# Altium PCB STM 32 F4 Robusta V1.PcbDoc (part 5 of 7)
Units mm, origin at the board's own origin, x right, y up, seen from the top; angles counter-clockwise.
Board outline 287.78 x 230 mm, 2 copper layers (Top Layer, Bottom Layer); 54 components, 96 nets, 355 pads, 16 vias.
Unrouted connection lines stored in the file: 3.
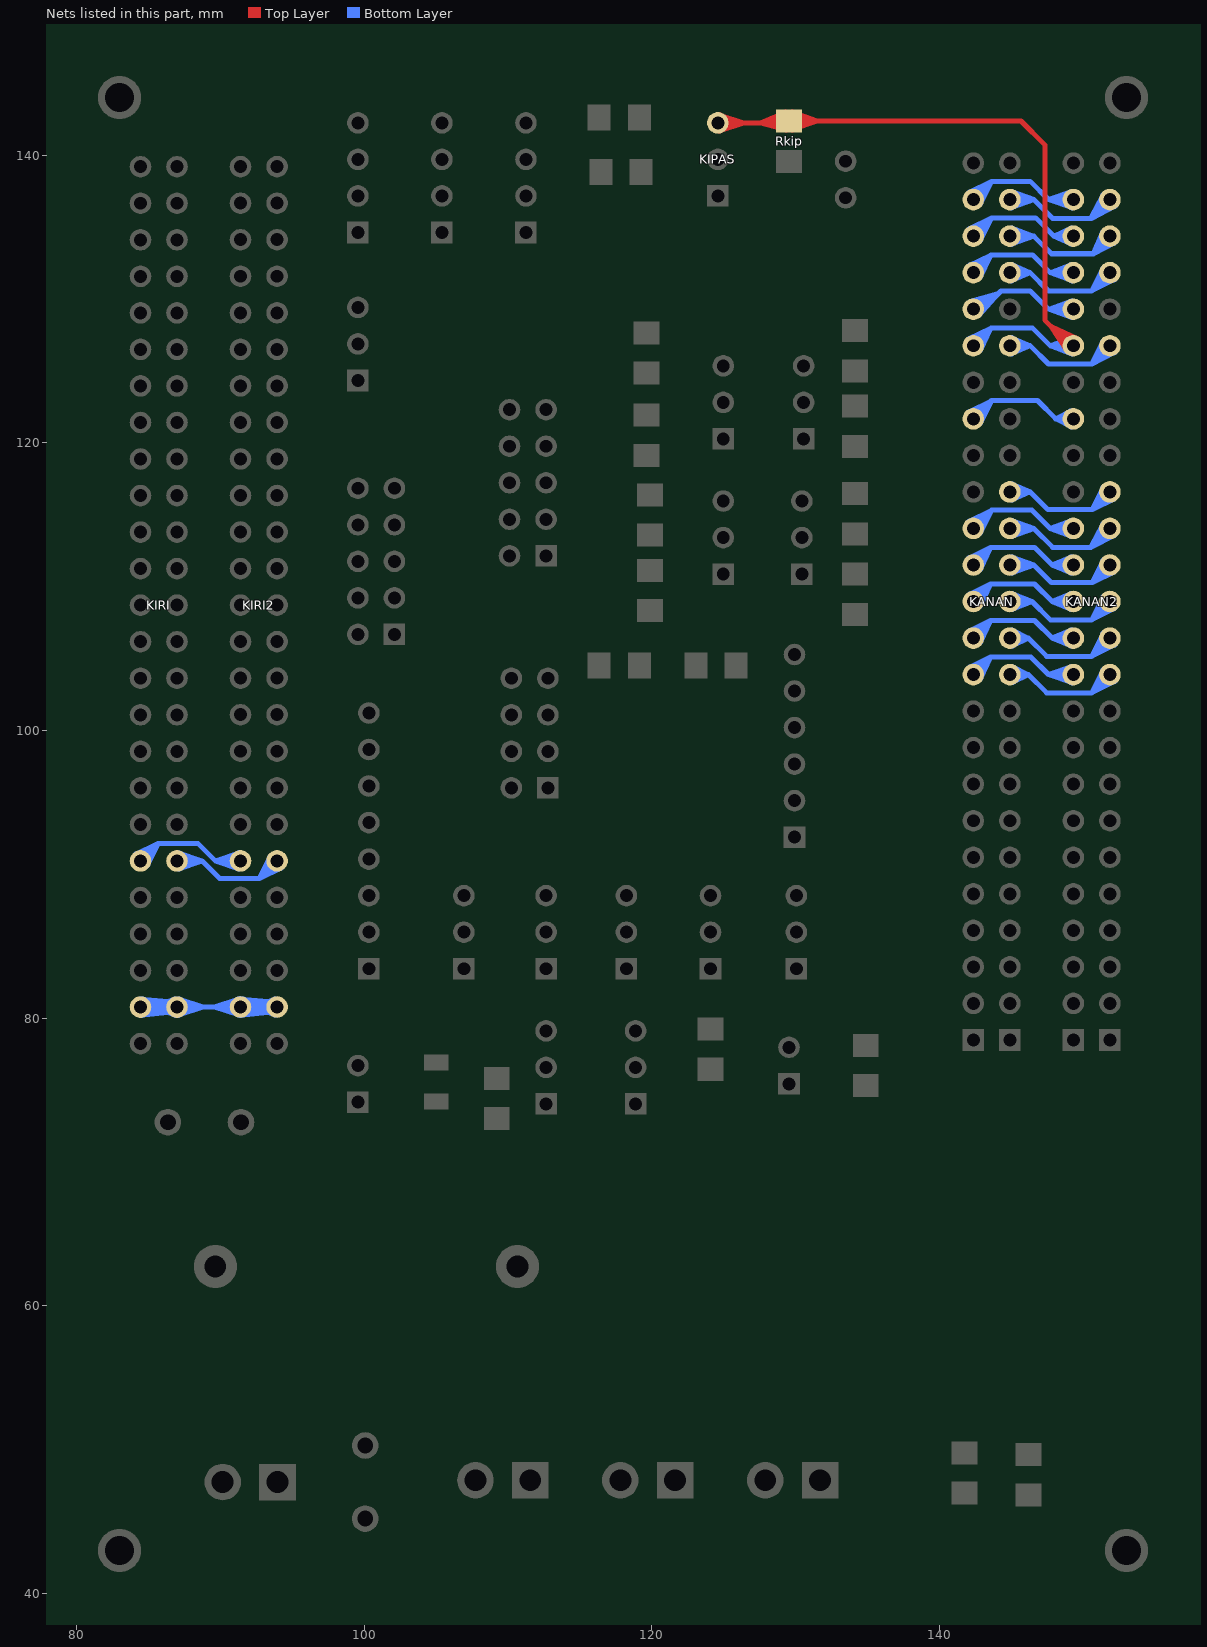
[diagram p5: the nets of this part, all layers, seen from the top]

## Via types
v1: diameter 1, hole 0.5, Top Layer to Bottom Layer, 13 vias
v2: diameter 0.8, hole 0.5, Top Layer to Bottom Layer, 3 vias

## Nets (pads, with @x,y where several pads share a name; then routed paths per layer and width w, separated by ;. In a path a pad name is that pad's centre, name@x,y a point inside that pad or via, vN(x,y) a via of type N, cw(c..) or ccw(c..) an arc to the next point about the centre after c; other vN are vias at no path point) (continued)
NetKANAN2_21: KANAN2.21 KANAN.21 KIRI2.3 KIRI2.4 KIRI.3 KIRI.4 | length 263.7
  Bottom Layer w0.35: KIRI.4@84.423,80.549 KIRI.3@86.357,80.386 ; KIRI.4@84.423,80.995 KIRI.3@86.357,81.158 ; KIRI.4@84.425,80.198 KIRI.3@86.357,80.386 ; KIRI.4@84.425,81.346 KIRI.3@86.357,81.158 ; KIRI.4@84.452,80.547 KIRI.3@86.304,80.633 ; KIRI.4@84.452,80.997 KIRI.3@86.304,80.911 ; KIRI.4@84.486,80.549 KIRI.3@86.304,80.911 ; KIRI.4@84.486,80.995 KIRI.3@86.304,80.633 ; KIRI.4@84.49,80.55 85.484,80.819 ; KIRI.4@84.49,80.994 85.484,80.725 ; KIRI.4@84.501,80.199 KIRI.3@86.304,80.633 ; KIRI.4@84.501,81.345 KIRI.3@86.304,80.911 ; KIRI.4@84.512,80.554 KIRI.3@86.357,81.158 ; KIRI.4@84.512,80.99 KIRI.3@86.357,80.386 ; KIRI.4@84.547,80.204 KIRI.3@86.255,80.772 ; KIRI.4@84.547,81.34 KIRI.3@86.255,80.772 ; KIRI.4@84.587,80.212 KIRI.3@86.304,80.911 ; KIRI.4@84.587,81.332 KIRI.3@86.304,80.633 ; KIRI.4@84.59,80.213 85.484,80.725 ; KIRI.4@84.59,81.331 85.484,80.819 ; KIRI.4@84.641,80.228 85.484,80.819 ; KIRI.4@84.641,81.316 85.484,80.725 ; KIRI.4@84.652,80.232 KIRI.3@86.357,81.158 ; KIRI.4@84.652,81.312 KIRI.3@86.357,80.386 ; KIRI.4@84.862,80.365 cw(c85.843,79.384) 85.843,80.772 cw(c85.843,82.16) KIRI.4@84.862,81.179 ; KIRI.3@86.588,80.365 ccw(c85.607,79.384) 85.607,80.772 ccw(c85.607,82.16) KIRI.3@86.588,81.179 ; KIRI.3@86.809,80.228 85.966,80.819 ; KIRI.3@86.809,81.316 85.966,80.725 ; KIRI.3@86.86,80.213 85.966,80.725 ; KIRI.3@86.86,81.331 85.966,80.819 ; KIRI.3@86.903,80.204 KIRI.4@85.195,80.772 ; KIRI.3@86.903,81.34 KIRI.4@85.195,80.772 ; KIRI.3@86.96,80.55 85.966,80.819 ; KIRI.3@86.96,80.994 85.966,80.725 ; KIRI.3@87.03,80.55 88.024,80.819 ; KIRI.3@87.03,80.994 88.024,80.725 ; KIRI.3@87.087,80.204 88.795,80.772 ; KIRI.3@87.087,81.34 88.795,80.772 ; KIRI.3@87.13,80.213 88.024,80.725 ; KIRI.3@87.13,81.331 88.024,80.819 ; KIRI.3@87.181,80.228 88.024,80.819 ; KIRI.3@87.181,81.316 88.024,80.725 ; KIRI.3@87.402,80.365 cw(c88.383,79.384) 88.383,80.772 cw(c88.383,82.16) KIRI.3@87.402,81.179 ; 90.01,80.772 ccw(c90.01,82.177) KIRI2.4@91.003,81.184 ; 90.034,80.772 cw(c90.034,79.401) KIRI2.4@91.003,80.37 ; KIRI2.4@91.221,81.32 90.389,80.725 ; KIRI2.4@91.228,80.232 90.373,80.82 ; KIRI2.4@91.274,81.336 90.373,80.82 ; KIRI2.4@91.276,80.218 90.389,80.725 ; KIRI2.4@91.317,81.344 89.61,80.772 ; KIRI2.4@91.32,80.209 89.61,80.772 ; KIRI2.4@91.374,80.999 90.389,80.725 ; KIRI2.4@91.376,80.555 90.373,80.82 ; KIRI2.4@91.378,80.554 KIRI2.3@93.308,80.391 ; KIRI2.4@91.378,81 KIRI2.3@93.315,81.163 ; KIRI2.4@91.38,80.203 KIRI2.3@93.308,80.391 ; KIRI2.4@91.38,81.351 KIRI2.3@93.315,81.163 ; KIRI2.4@91.395,81.001 90.373,80.82 ; KIRI2.4@91.395,81.002 89.61,80.772 ; KIRI2.4@91.407,80.552 KIRI2.3@93.254,80.636 ; KIRI2.4@91.407,81.002 KIRI2.3@93.263,80.915 ; KIRI2.4@91.44,80.554 KIRI2.3@93.263,80.915 ; KIRI2.4@91.441,81 KIRI2.3@93.254,80.636 ; KIRI2.4@91.444,80.555 92.446,80.82 ; KIRI2.4@91.446,80.999 92.431,80.725 ; KIRI2.4@91.456,80.204 KIRI2.3@93.254,80.636 ; KIRI2.4@91.456,81.35 KIRI2.3@93.263,80.915 ; KIRI2.4@91.467,80.559 KIRI2.3@93.315,81.163 ; KIRI2.4@91.468,80.994 KIRI2.3@93.308,80.391 ; KIRI2.4@91.5,80.209 KIRI2.3@93.21,80.772 ; KIRI2.4@91.501,80.209 KIRI2.3@93.211,80.775 ; KIRI2.4@91.502,81.345 KIRI2.3@93.211,80.775 ; KIRI2.4@91.503,81.344 KIRI2.3@93.21,80.772 ; KIRI2.4@91.541,80.217 KIRI2.3@93.263,80.915 ; KIRI2.4@91.542,81.337 KIRI2.3@93.254,80.636 ; KIRI2.4@91.544,80.218 92.431,80.725 ; KIRI2.4@91.546,81.336 92.446,80.82 ; KIRI2.4@91.592,80.232 92.446,80.82 ; KIRI2.4@91.599,81.32 92.431,80.725 ; KIRI2.4@91.606,80.236 KIRI2.3@93.315,81.163 ; KIRI2.4@91.607,81.317 KIRI2.3@93.308,80.391 ; KIRI2.4@91.817,80.37 cw(c92.786,79.401) 92.786,80.772 ; KIRI2.4@91.817,81.184 ccw(c92.81,82.177) 92.81,80.772 ; 92.55,80.772 ccw(c92.55,82.177) KIRI2.3@93.543,81.184 ; 92.574,80.772 cw(c92.574,79.401) KIRI2.3@93.543,80.37 ; KIRI2.3@93.761,81.32 92.929,80.725 ; KIRI2.3@93.768,80.232 92.913,80.82 ; KIRI2.3@93.814,81.336 92.913,80.82 ; KIRI2.3@93.816,80.218 92.929,80.725 ; KIRI2.3@93.857,81.344 KIRI2.4@92.15,80.772 ; KIRI2.3@93.86,80.209 KIRI2.4@92.15,80.772 ; KIRI2.3@93.914,80.999 92.929,80.725 ; KIRI2.3@93.916,80.555 92.913,80.82 ; KIRI2.3@93.935,81.001 92.913,80.82 ; KIRI2.3@93.935,81.002 KIRI2.4@92.15,80.772 ; KIRI2.3@93.945,80.772 KIRI.3@86.995,80.772 ; KANAN.21@144.903,103.661 145.818,103.829 ; KANAN.21@144.903,104.111 145.818,103.943 ; KANAN.21@144.91,103.662 146.177,103.886 ; KANAN.21@144.91,104.11 146.177,103.886 ; KANAN.21@144.931,103.665 145.818,103.943 ; KANAN.21@144.931,104.107 145.818,103.829 ; KANAN.21@145.018,103.326 146.177,103.886 ; KANAN.21@145.018,104.446 146.177,103.886 ; KANAN.21@145.034,103.329 145.818,103.829 ; KANAN.21@145.034,104.443 145.818,103.943 ; KANAN.21@145.101,103.351 145.818,103.943 ; KANAN.21@145.101,104.421 145.818,103.829 ; KANAN.21@145.318,103.502 cw(c146.177,102.733) 146.177,103.886 ; KANAN.21@145.318,104.27 ccw(c146.177,105.039) 146.177,103.886 ; KANAN2.21@151.27,103.886 cw(c149.882,103.886) 150.863,102.904 cw(c151.845,101.923) KANAN2.21@151.845,103.311 ; KANAN2.21@151.329,104.139 151.151,103.125 ; KANAN2.21@151.354,104.186 151.084,103.192 ; KANAN2.21@151.379,104.222 150.575,102.616 ; KANAN2.21@151.663,104.019 151.151,103.125 ; KANAN2.21@151.978,103.704 151.084,103.192 ; KANAN2.21@152.099,103.37 151.084,103.192 ; KANAN2.21@152.145,103.395 151.151,103.125 ; KANAN2.21@152.181,103.42 150.575,102.616 ; KIRI.4@84.455,80.772 KIRI.3@86.357,81.158 ; KIRI.4@84.455,80.772 85.484,80.819 ; KIRI.4@84.455,80.772 KIRI.3@86.304,80.911 ; KIRI.4@84.455,80.772 KIRI.3@86.304,80.633 ; KIRI.4@84.455,80.772 KIRI.3@86.357,80.386 ; KIRI.4@84.455,80.772 85.484,80.725 ; KIRI.4@84.455,80.772 KIRI.3@86.995,80.772 ; KIRI.4@85.195,80.772 86.981,80.997 85.966,80.819 ; KIRI.4@85.195,80.772 86.981,80.547 85.966,80.725 ; 85.484,80.725 84.469,80.547 KIRI.3@86.255,80.772 ; 85.484,80.819 84.469,80.997 KIRI.3@86.255,80.772 ; 85.966,80.725 KIRI.3@86.995,80.772 ; 85.966,80.819 KIRI.3@86.995,80.772 ; KIRI.3@86.995,80.772 88.024,80.819 ; KIRI.3@86.995,80.772 88.024,80.725 ; 88.024,80.725 87.009,80.547 88.795,80.772 ; 88.024,80.819 87.009,80.997 88.795,80.772 ; 89.61,80.772 KIRI2.4@91.41,80.777 ; 89.61,80.772 91.397,80.552 90.389,80.725 ; 90.373,80.82 KIRI2.4@91.41,80.777 ; 90.389,80.725 KIRI2.4@91.41,80.777 ; KIRI2.4@91.41,80.777 KIRI2.3@93.21,80.772 ; KIRI2.4@91.41,80.777 KIRI2.3@93.315,81.163 ; KIRI2.4@91.41,80.777 KIRI2.3@93.211,80.775 ; KIRI2.4@91.41,80.777 KIRI2.3@93.263,80.915 ; KIRI2.4@91.41,80.777 KIRI2.3@93.254,80.636 ; KIRI2.4@91.41,80.777 KIRI2.3@93.308,80.391 ; KIRI2.4@91.41,80.777 92.446,80.82 ; KIRI2.4@91.41,80.777 92.431,80.725 ; KIRI2.4@91.423,80.552 KIRI2.3@93.21,80.772 ; KIRI2.4@91.424,80.552 KIRI2.3@93.211,80.775 ; KIRI2.4@91.423,80.552 92.431,80.725 ; KIRI2.4@91.425,81.002 KIRI2.3@93.21,80.772 ; KIRI2.4@91.424,81.002 KIRI2.3@93.211,80.775 ; KIRI2.4@91.425,81.001 92.446,80.82 ; KIRI2.4@92.15,80.772 KIRI2.3@93.95,80.777 ; KIRI2.4@92.15,80.772 93.937,80.552 92.929,80.725 ; 92.913,80.82 KIRI2.3@93.95,80.777 ; 92.929,80.725 KIRI2.3@93.95,80.777 ; KANAN.21@144.89,103.886 145.818,103.829 ; KANAN.21@144.89,103.886 145.818,103.943 ; KANAN.21@144.89,103.886 146.177,103.886 ; 146.177,103.886 147.447,102.616 150.575,102.616 ; 150.575,102.616 KANAN2.21@151.845,103.886 ; 150.575,102.616 151.676,104.035 151.084,103.192 ; 150.575,102.616 151.994,103.717 151.151,103.125 ; 150.575,102.616 KANAN2.21@151.845,103.886 ; 151.084,103.192 KANAN2.21@151.845,103.886 ; 151.151,103.125 KANAN2.21@151.845,103.886
NetKANAN2_22: KANAN2.22 KANAN.22 | length 48.5
  Bottom Layer w0.35: KANAN.22@142.017,104.354 143.575,105.111 ; KANAN.22@142.05,104.377 143.044,104.647 ; KANAN.22@142.096,104.402 143.111,104.58 ; KANAN.22@142.217,104.068 143.111,104.58 ; KANAN.22@142.35,104.461 ccw(c142.35,105.849) 143.332,104.868 ccw(c144.313,103.886) KANAN.22@142.925,103.886 ; KANAN.22@142.532,103.753 143.044,104.647 ; KANAN.22@142.818,103.553 143.575,105.111 ; KANAN.22@142.841,103.586 143.111,104.58 ; KANAN.22@142.866,103.633 143.044,104.647 ; KANAN2.22@148.898,103.479 ccw(c147.917,102.498) 147.917,103.886 ccw(c147.917,105.274) KANAN2.22@148.898,104.293 ; KANAN2.22@149.119,103.342 148.276,103.933 ; KANAN2.22@149.119,104.43 148.276,103.839 ; KANAN2.22@149.17,103.327 148.276,103.839 ; KANAN2.22@149.17,104.445 148.276,103.933 ; KANAN2.22@149.21,103.319 147.574,103.886 ; KANAN2.22@149.21,104.453 147.574,103.886 ; KANAN2.22@149.27,103.664 148.276,103.933 ; KANAN2.22@149.27,104.108 148.276,103.839 ; KANAN2.22@149.29,103.661 147.574,103.886 ; KANAN2.22@149.29,104.111 147.574,103.886 ; KANAN2.22@149.291,103.661 148.276,103.839 ; KANAN2.22@149.291,104.111 148.276,103.933 ; KANAN.22@142.35,103.886 143.044,104.647 ; KANAN.22@142.35,103.886 143.111,104.58 ; KANAN.22@142.35,103.886 143.575,105.111 ; 143.044,104.647 142.201,104.055 143.575,105.111 ; 143.111,104.58 142.519,103.737 143.575,105.111 ; 143.575,105.111 146.349,105.111 147.574,103.886 ; 147.574,103.886 KANAN2.22@149.305,103.886 ; 147.574,103.886 KANAN2.22@149.305,103.886 ; 148.276,103.839 KANAN2.22@149.305,103.886 ; 148.276,103.933 KANAN2.22@149.305,103.886
NetKANAN2_23: KANAN2.23 KANAN.23 | length 45.8
  Bottom Layer w0.35: KANAN.23@144.903,106.201 145.818,106.369 ; KANAN.23@144.903,106.651 145.818,106.483 ; KANAN.23@144.91,106.202 146.177,106.426 ; KANAN.23@144.91,106.65 146.177,106.426 ; KANAN.23@144.931,106.205 145.818,106.483 ; KANAN.23@144.931,106.647 145.818,106.369 ; KANAN.23@145.018,105.866 146.177,106.426 ; KANAN.23@145.018,106.986 146.177,106.426 ; KANAN.23@145.034,105.869 145.818,106.369 ; KANAN.23@145.034,106.983 145.818,106.483 ; KANAN.23@145.101,105.891 145.818,106.483 ; KANAN.23@145.101,106.961 145.818,106.369 ; KANAN.23@145.318,106.042 cw(c146.177,105.273) 146.177,106.426 ; KANAN.23@145.318,106.81 ccw(c146.177,107.579) 146.177,106.426 ; KANAN2.23@151.27,106.426 cw(c149.882,106.426) 150.863,105.444 cw(c151.845,104.463) KANAN2.23@151.845,105.851 ; KANAN2.23@151.329,106.679 151.151,105.665 ; KANAN2.23@151.354,106.726 151.084,105.732 ; KANAN2.23@151.379,106.762 150.575,105.156 ; KANAN2.23@151.663,106.559 151.151,105.665 ; KANAN2.23@151.978,106.244 151.084,105.732 ; KANAN2.23@152.099,105.91 151.084,105.732 ; KANAN2.23@152.145,105.935 151.151,105.665 ; KANAN2.23@152.181,105.96 150.575,105.156 ; KANAN.23@144.89,106.426 145.818,106.483 ; KANAN.23@144.89,106.426 145.818,106.369 ; KANAN.23@144.89,106.426 146.177,106.426 ; 146.177,106.426 147.447,105.156 150.575,105.156 ; 150.575,105.156 KANAN2.23@151.845,106.426 ; 150.575,105.156 151.676,106.575 151.084,105.732 ; 150.575,105.156 151.994,106.257 151.151,105.665 ; 150.575,105.156 KANAN2.23@151.845,106.426 ; 151.084,105.732 KANAN2.23@151.845,106.426 ; 151.151,105.665 KANAN2.23@151.845,106.426
NetKANAN2_24: KANAN2.24 KANAN.24 | length 47.2
  Bottom Layer w0.35: KANAN.24@142.017,106.894 143.575,107.651 ; KANAN.24@142.05,106.917 143.044,107.187 ; KANAN.24@142.096,106.942 143.111,107.12 ; KANAN.24@142.217,106.608 143.111,107.12 ; KANAN.24@142.35,107.001 ccw(c142.35,108.389) 143.332,107.408 ccw(c144.313,106.426) KANAN.24@142.925,106.426 ; KANAN.24@142.532,106.293 143.044,107.187 ; KANAN.24@142.818,106.093 143.575,107.651 ; KANAN.24@142.841,106.126 143.111,107.12 ; KANAN.24@142.866,106.173 143.044,107.187 ; KANAN2.24@148.898,106.019 ccw(c147.917,105.038) 147.917,106.426 ccw(c147.917,107.814) KANAN2.24@148.898,106.833 ; KANAN2.24@149.119,105.882 148.276,106.473 ; KANAN2.24@149.119,106.97 148.276,106.379 ; KANAN2.24@149.17,105.867 148.276,106.379 ; KANAN2.24@149.17,106.985 148.276,106.473 ; KANAN2.24@149.193,105.862 147.828,106.426 ; KANAN2.24@149.193,106.99 147.828,106.426 ; KANAN2.24@149.27,106.204 148.276,106.473 ; KANAN2.24@149.27,106.648 148.276,106.379 ; KANAN2.24@149.288,106.202 147.828,106.426 ; KANAN2.24@149.288,106.65 147.828,106.426 ; KANAN2.24@149.291,106.201 148.276,106.379 ; KANAN2.24@149.291,106.651 148.276,106.473 ; KANAN.24@142.35,106.426 143.044,107.187 ; KANAN.24@142.35,106.426 143.111,107.12 ; KANAN.24@142.35,106.426 143.575,107.651 ; 143.044,107.187 142.201,106.595 143.575,107.651 ; 143.111,107.12 142.519,106.277 143.575,107.651 ; 143.575,107.651 146.603,107.651 147.828,106.426 ; 147.828,106.426 KANAN2.24@149.305,106.426 ; 147.828,106.426 KANAN2.24@149.305,106.426 ; 148.276,106.379 KANAN2.24@149.305,106.426 ; 148.276,106.473 KANAN2.24@149.305,106.426
NetKANAN2_25: KANAN2.25 KANAN.25 | length 48.1
  Bottom Layer w0.35: KANAN.25@144.904,108.741 145.919,108.919 ; KANAN.25@144.904,109.191 145.919,109.013 ; KANAN.25@144.906,108.742 146.431,108.966 ; KANAN.25@144.906,109.19 146.431,108.966 ; KANAN.25@144.925,108.744 145.919,109.013 ; KANAN.25@144.925,109.188 145.919,108.919 ; KANAN.25@144.997,108.401 146.431,108.966 ; KANAN.25@144.997,109.531 146.431,108.966 ; KANAN.25@145.025,108.407 145.919,108.919 ; KANAN.25@145.025,109.525 145.919,109.013 ; KANAN.25@145.076,108.422 145.919,109.013 ; KANAN.25@145.076,109.51 145.919,108.919 ; KANAN.25@145.297,108.559 cw(c146.278,107.578) 146.278,108.966 cw(c146.278,110.354) KANAN.25@145.297,109.373 ; KANAN2.25@151.27,108.966 cw(c149.882,108.966) 150.863,107.984 cw(c151.845,107.003) KANAN2.25@151.845,108.391 ; KANAN2.25@151.329,109.219 151.151,108.205 ; KANAN2.25@151.354,109.266 151.084,108.272 ; KANAN2.25@151.379,109.302 150.575,107.696 ; KANAN2.25@151.663,109.099 151.151,108.205 ; KANAN2.25@151.978,108.784 151.084,108.272 ; KANAN2.25@152.099,108.45 151.084,108.272 ; KANAN2.25@152.145,108.475 151.151,108.205 ; KANAN2.25@152.181,108.5 150.575,107.696 ; KANAN.25@144.89,108.966 145.919,109.013 ; KANAN.25@144.89,108.966 145.919,108.919 ; KANAN.25@144.89,108.966 146.431,108.966 ; 146.431,108.966 147.701,107.696 150.575,107.696 ; 150.575,107.696 KANAN2.25@151.845,108.966 ; 150.575,107.696 151.676,109.115 151.084,108.272 ; 150.575,107.696 151.994,108.797 151.151,108.205 ; 150.575,107.696 KANAN2.25@151.845,108.966 ; 151.084,108.272 KANAN2.25@151.845,108.966 ; 151.151,108.205 KANAN2.25@151.845,108.966
NetKANAN2_26: KANAN2.26 KANAN.26 | length 47.2
  Bottom Layer w0.35: KANAN.26@142.017,109.434 143.575,110.191 ; KANAN.26@142.05,109.457 143.044,109.727 ; KANAN.26@142.096,109.482 143.111,109.66 ; KANAN.26@142.217,109.148 143.111,109.66 ; KANAN.26@142.35,109.541 ccw(c142.35,110.929) 143.332,109.948 ccw(c144.313,108.966) KANAN.26@142.925,108.966 ; KANAN.26@142.532,108.833 143.044,109.727 ; KANAN.26@142.818,108.633 143.575,110.191 ; KANAN.26@142.841,108.666 143.111,109.66 ; KANAN.26@142.866,108.713 143.044,109.727 ; KANAN2.26@148.898,108.559 ccw(c147.917,107.578) 147.917,108.966 ccw(c147.917,110.354) KANAN2.26@148.898,109.373 ; KANAN2.26@149.119,108.422 148.276,109.013 ; KANAN2.26@149.119,109.51 148.276,108.919 ; KANAN2.26@149.17,108.407 148.276,108.919 ; KANAN2.26@149.17,109.525 148.276,109.013 ; KANAN2.26@149.193,108.402 147.828,108.966 ; KANAN2.26@149.193,109.53 147.828,108.966 ; KANAN2.26@149.27,108.744 148.276,109.013 ; KANAN2.26@149.27,109.188 148.276,108.919 ; KANAN2.26@149.288,108.742 147.828,108.966 ; KANAN2.26@149.288,109.19 147.828,108.966 ; KANAN2.26@149.291,108.741 148.276,108.919 ; KANAN2.26@149.291,109.191 148.276,109.013 ; KANAN.26@142.35,108.966 143.044,109.727 ; KANAN.26@142.35,108.966 143.111,109.66 ; KANAN.26@142.35,108.966 143.575,110.191 ; 143.044,109.727 142.201,109.135 143.575,110.191 ; 143.111,109.66 142.519,108.817 143.575,110.191 ; 143.575,110.191 146.603,110.191 147.828,108.966 ; 147.828,108.966 KANAN2.26@149.305,108.966 ; 147.828,108.966 KANAN2.26@149.305,108.966 ; 148.276,108.919 KANAN2.26@149.305,108.966 ; 148.276,109.013 KANAN2.26@149.305,108.966
NetKANAN2_27: KANAN2.27 KANAN.27 | length 48.3
  Bottom Layer w0.35: KANAN.27@144.904,111.281 145.919,111.459 ; KANAN.27@144.904,111.731 145.919,111.553 ; KANAN.27@144.905,111.282 146.558,111.506 ; KANAN.27@144.905,111.73 146.558,111.506 ; KANAN.27@144.925,111.284 145.919,111.553 ; KANAN.27@144.925,111.728 145.919,111.459 ; KANAN.27@144.989,110.94 146.558,111.506 ; KANAN.27@144.989,112.072 146.558,111.506 ; KANAN.27@145.025,110.947 145.919,111.459 ; KANAN.27@145.025,112.065 145.919,111.553 ; KANAN.27@145.076,110.962 145.919,111.553 ; KANAN.27@145.076,112.05 145.919,111.459 ; KANAN.27@145.297,111.099 cw(c146.278,110.118) 146.278,111.506 cw(c146.278,112.894) KANAN.27@145.297,111.913 ; KANAN2.27@151.27,111.506 cw(c149.882,111.506) 150.863,110.524 cw(c151.845,109.543) KANAN2.27@151.845,110.931 ; KANAN2.27@151.329,111.759 151.151,110.745 ; KANAN2.27@151.354,111.806 151.084,110.812 ; KANAN2.27@151.377,111.839 150.62,110.281 ; KANAN2.27@151.663,111.639 151.151,110.745 ; KANAN2.27@151.978,111.324 151.084,110.812 ; KANAN2.27@152.099,110.99 151.084,110.812 ; KANAN2.27@152.145,111.015 151.151,110.745 ; KANAN2.27@152.178,111.038 150.62,110.281 ; KANAN.27@144.89,111.506 145.919,111.553 ; KANAN.27@144.89,111.506 145.919,111.459 ; KANAN.27@144.89,111.506 146.558,111.506 ; 146.558,111.506 147.783,110.281 150.62,110.281 ; 150.62,110.281 KANAN2.27@151.845,111.506 ; 150.62,110.281 151.676,111.654 151.084,110.812 ; 150.62,110.281 151.993,111.337 151.151,110.745 ; 150.62,110.281 KANAN2.27@151.845,111.506 ; 151.084,110.812 KANAN2.27@151.845,111.506 ; 151.151,110.745 KANAN2.27@151.845,111.506
NetKANAN2_28: KANAN2.28 KANAN.28 | length 47.2
  Bottom Layer w0.35: KANAN.28@142.017,111.974 143.575,112.731 ; KANAN.28@142.05,111.997 143.044,112.267 ; KANAN.28@142.096,112.022 143.111,112.2 ; KANAN.28@142.217,111.688 143.111,112.2 ; KANAN.28@142.35,112.081 ccw(c142.35,113.469) 143.332,112.488 ccw(c144.313,111.506) KANAN.28@142.925,111.506 ; KANAN.28@142.532,111.373 143.044,112.267 ; KANAN.28@142.818,111.173 143.575,112.731 ; KANAN.28@142.841,111.206 143.111,112.2 ; KANAN.28@142.866,111.253 143.044,112.267 ; KANAN2.28@148.898,111.099 ccw(c147.917,110.118) 147.917,111.506 ccw(c147.917,112.894) KANAN2.28@148.898,111.913 ; KANAN2.28@149.119,110.962 148.276,111.553 ; KANAN2.28@149.119,112.05 148.276,111.459 ; KANAN2.28@149.17,110.947 148.276,111.459 ; KANAN2.28@149.17,112.065 148.276,111.553 ; KANAN2.28@149.193,110.942 147.828,111.506 ; KANAN2.28@149.193,112.07 147.828,111.506 ; KANAN2.28@149.27,111.284 148.276,111.553 ; KANAN2.28@149.27,111.728 148.276,111.459 ; KANAN2.28@149.288,111.282 147.828,111.506 ; KANAN2.28@149.288,111.73 147.828,111.506 ; KANAN2.28@149.291,111.281 148.276,111.459 ; KANAN2.28@149.291,111.731 148.276,111.553 ; KANAN.28@142.35,111.506 143.044,112.267 ; KANAN.28@142.35,111.506 143.111,112.2 ; KANAN.28@142.35,111.506 143.575,112.731 ; 143.044,112.267 142.201,111.675 143.575,112.731 ; 143.111,112.2 142.519,111.357 143.575,112.731 ; 143.575,112.731 146.603,112.731 147.828,111.506 ; 147.828,111.506 KANAN2.28@149.305,111.506 ; 147.828,111.506 KANAN2.28@149.305,111.506 ; 148.276,111.459 KANAN2.28@149.305,111.506 ; 148.276,111.553 KANAN2.28@149.305,111.506
NetKANAN2_29: KANAN2.29 KANAN.29 | length 49
  Bottom Layer w0.35: KANAN.29@144.904,113.821 145.919,113.999 ; KANAN.29@144.904,114.271 145.919,114.093 ; KANAN.29@144.905,113.822 146.558,114.046 ; KANAN.29@144.905,114.27 146.558,114.046 ; KANAN.29@144.925,113.824 145.919,114.093 ; KANAN.29@144.925,114.268 145.919,113.999 ; KANAN.29@144.989,113.48 146.558,114.046 ; KANAN.29@144.989,114.612 146.558,114.046 ; KANAN.29@145.025,113.487 145.919,113.999 ; KANAN.29@145.025,114.605 145.919,114.093 ; KANAN.29@145.076,113.502 145.919,114.093 ; KANAN.29@145.076,114.59 145.919,113.999 ; KANAN.29@145.297,113.639 cw(c146.278,112.658) 146.278,114.046 cw(c146.278,115.434) KANAN.29@145.297,114.453 ; KANAN2.29@151.27,114.046 cw(c149.882,114.046) 150.863,113.064 cw(c151.845,112.083) KANAN2.29@151.845,113.471 ; KANAN2.29@151.329,114.299 151.151,113.285 ; KANAN2.29@151.354,114.346 151.084,113.352 ; KANAN2.29@151.38,114.385 150.53,112.731 ; KANAN2.29@151.663,114.179 151.151,113.285 ; KANAN2.29@151.978,113.864 151.084,113.352 ; KANAN2.29@152.099,113.53 151.084,113.352 ; KANAN2.29@152.145,113.555 151.151,113.285 ; KANAN2.29@152.184,113.581 150.53,112.731 ; KANAN.29@144.89,114.046 145.919,113.999 ; KANAN.29@144.89,114.046 145.919,114.093 ; KANAN.29@144.89,114.046 146.558,114.046 ; 146.558,114.046 147.873,112.731 150.53,112.731 ; 150.53,112.731 KANAN2.29@151.845,114.046 ; 150.53,112.731 151.677,114.195 151.084,113.352 ; 150.53,112.731 151.994,113.878 151.151,113.285 ; 150.53,112.731 KANAN2.29@151.845,114.046 ; 151.084,113.352 KANAN2.29@151.845,114.046 ; 151.151,113.285 KANAN2.29@151.845,114.046
NetKANAN2_30: KANAN2.30 KANAN.30 | length 48.2
  Bottom Layer w0.35: KANAN.30@142.014,114.512 143.62,115.316 ; KANAN.30@142.05,114.537 143.044,114.807 ; KANAN.30@142.096,114.562 143.111,114.74 ; KANAN.30@142.201,114.215 143.62,115.316 ; KANAN.30@142.201,114.215 143.044,114.807 ; KANAN.30@142.217,114.228 143.111,114.74 ; KANAN.30@142.35,114.621 ccw(c142.35,116.009) 143.332,115.028 ccw(c144.313,114.046) KANAN.30@142.925,114.046 ; KANAN.30@142.519,113.897 143.62,115.316 ; KANAN.30@142.519,113.897 143.111,114.74 ; KANAN.30@142.532,113.913 143.044,114.807 ; KANAN.30@142.816,113.71 143.62,115.316 ; KANAN.30@142.841,113.746 143.111,114.74 ; KANAN.30@142.866,113.793 143.044,114.807 ; KANAN2.30@148.898,113.639 ccw(c147.917,112.658) 147.917,114.046 ccw(c147.917,115.434) KANAN2.30@148.898,114.453 ; KANAN2.30@149.119,113.502 148.276,114.093 ; KANAN2.30@149.119,114.59 148.276,113.999 ; KANAN2.30@149.17,113.487 148.276,113.999 ; KANAN2.30@149.17,114.605 148.276,114.093 ; KANAN2.30@149.202,113.48 147.701,114.046 ; KANAN2.30@149.202,114.612 147.701,114.046 ; KANAN2.30@149.27,113.824 148.276,114.093 ; KANAN2.30@149.27,114.268 148.276,113.999 ; KANAN2.30@149.289,113.822 147.701,114.046 ; KANAN2.30@149.289,114.27 147.701,114.046 ; KANAN2.30@149.291,113.821 148.276,113.999 ; KANAN2.30@149.291,114.271 148.276,114.093 ; KANAN.30@142.35,114.046 143.044,114.807 ; KANAN.30@142.35,114.046 143.111,114.74 ; KANAN.30@142.35,114.046 143.62,115.316 ; 143.62,115.316 146.431,115.316 147.701,114.046 ; 147.701,114.046 KANAN2.30@149.305,114.046 ; 147.701,114.046 KANAN2.30@149.305,114.046 ; 148.276,113.999 KANAN2.30@149.305,114.046 ; 148.276,114.093 KANAN2.30@149.305,114.046
NetKANAN2_31: KANAN2.31 KANAN.31 | length 47.2
  Bottom Layer w0.35: KANAN.31@144.904,116.361 145.919,116.539 ; KANAN.31@144.904,116.811 145.919,116.633 ; KANAN.31@144.908,116.362 146.304,116.586 ; KANAN.31@144.908,116.81 146.304,116.586 ; KANAN.31@144.925,116.364 145.919,116.633 ; KANAN.31@144.925,116.808 145.919,116.539 ; KANAN.31@145.007,116.023 146.304,116.586 ; KANAN.31@145.007,117.149 146.304,116.586 ; KANAN.31@145.025,116.027 145.919,116.539 ; KANAN.31@145.025,117.145 145.919,116.633 ; KANAN.31@145.076,116.042 145.919,116.633 ; KANAN.31@145.076,117.13 145.919,116.539 ; KANAN.31@145.297,116.179 cw(c146.278,115.198) 146.278,116.586 cw(c146.278,117.974) KANAN.31@145.297,116.993 ; KANAN2.31@151.27,116.586 cw(c149.882,116.586) 150.863,115.604 cw(c151.845,114.623) KANAN2.31@151.845,116.011 ; KANAN2.31@151.329,116.839 151.151,115.825 ; KANAN2.31@151.354,116.886 151.084,115.892 ; KANAN2.31@151.377,116.919 150.62,115.361 ; KANAN2.31@151.663,116.719 151.151,115.825 ; KANAN2.31@151.978,116.404 151.084,115.892 ; KANAN2.31@152.099,116.07 151.084,115.892 ; KANAN2.31@152.145,116.095 151.151,115.825 ; KANAN2.31@152.178,116.118 150.62,115.361 ; KANAN.31@144.89,116.586 145.919,116.633 ; KANAN.31@144.89,116.586 145.919,116.539 ; KANAN.31@144.89,116.586 146.304,116.586 ; 146.304,116.586 147.529,115.361 150.62,115.361 ; 150.62,115.361 KANAN2.31@151.845,116.586 ; 150.62,115.361 151.676,116.734 151.084,115.892 ; 150.62,115.361 151.993,116.417 151.151,115.825 ; 150.62,115.361 KANAN2.31@151.845,116.586 ; 151.084,115.892 KANAN2.31@151.845,116.586 ; 151.151,115.825 KANAN2.31@151.845,116.586
NetKANAN2_36: KANAN2.36 KANAN.36 | length 44.3
  Bottom Layer w0.35: KANAN.36@142.014,122.132 143.62,122.936 ; KANAN.36@142.05,122.157 143.044,122.427 ; KANAN.36@142.096,122.182 143.111,122.36 ; KANAN.36@142.201,121.835 143.62,122.936 ; KANAN.36@142.201,121.835 143.044,122.427 ; KANAN.36@142.217,121.848 143.111,122.36 ; KANAN.36@142.35,122.241 ccw(c142.35,123.629) 143.332,122.648 ccw(c144.313,121.666) KANAN.36@142.925,121.666 ; KANAN.36@142.519,121.517 143.62,122.936 ; KANAN.36@142.519,121.517 143.111,122.36 ; KANAN.36@142.532,121.533 143.044,122.427 ; KANAN.36@142.816,121.33 143.62,122.936 ; KANAN.36@142.841,121.366 143.111,122.36 ; KANAN.36@142.866,121.413 143.044,122.427 ; KANAN2.36@148.862,121.299 ccw(c148.082,120.653) 148.082,121.666 ; KANAN2.36@148.862,122.033 cw(c148.082,122.679) 148.082,121.666 ; KANAN2.36@149.077,121.138 148.435,121.729 ; KANAN2.36@149.077,122.194 148.435,121.603 ; KANAN2.36@149.155,121.111 148.435,121.603 ; KANAN2.36@149.155,122.221 148.435,121.729 ; KANAN2.36@149.17,121.107 148.082,121.666 ; KANAN2.36@149.17,122.225 148.082,121.666 ; KANAN2.36@149.26,121.446 148.435,121.729 ; KANAN2.36@149.26,121.886 148.435,121.603 ; KANAN2.36@149.284,121.442 148.082,121.666 ; KANAN2.36@149.284,121.89 148.082,121.666 ; KANAN2.36@149.292,121.441 148.435,121.603 ; KANAN2.36@149.292,121.891 148.435,121.729 ; KANAN.36@142.35,121.666 143.044,122.427 ; KANAN.36@142.35,121.666 143.111,122.36 ; KANAN.36@142.35,121.666 143.62,122.936 ; 143.62,122.936 146.812,122.936 148.082,121.666 ; 148.082,121.666 KANAN2.36@149.305,121.666 ; 148.082,121.666 KANAN2.36@149.305,121.666 ; 148.435,121.603 KANAN2.36@149.305,121.666 ; 148.435,121.729 KANAN2.36@149.305,121.666
NetKANAN2_39: KANAN2.39 KANAN.39 | length 47.6
  Bottom Layer w0.35: KANAN.39@144.904,126.521 145.919,126.699 ; KANAN.39@144.904,126.971 145.919,126.793 ; KANAN.39@144.908,126.522 146.304,126.746 ; KANAN.39@144.908,126.97 146.304,126.746 ; KANAN.39@144.925,126.524 145.919,126.793 ; KANAN.39@144.925,126.968 145.919,126.699 ; KANAN.39@145.007,126.183 146.304,126.746 ; KANAN.39@145.007,127.309 146.304,126.746 ; KANAN.39@145.025,126.187 145.919,126.699 ; KANAN.39@145.025,127.305 145.919,126.793 ; KANAN.39@145.076,126.202 145.919,126.793 ; KANAN.39@145.076,127.29 145.919,126.699 ; KANAN.39@145.297,126.339 cw(c146.278,125.358) 146.278,126.746 cw(c146.278,128.134) KANAN.39@145.297,127.153 ; KANAN2.39@151.27,126.746 cw(c149.882,126.746) 150.863,125.764 cw(c151.845,124.783) KANAN2.39@151.845,126.171 ; KANAN2.39@151.329,126.999 151.151,125.985 ; KANAN2.39@151.354,127.046 151.084,126.052 ; KANAN2.39@151.379,127.082 150.575,125.476 ; KANAN2.39@151.663,126.879 151.151,125.985 ; KANAN2.39@151.978,126.564 151.084,126.052 ; KANAN2.39@152.099,126.23 151.084,126.052 ; KANAN2.39@152.145,126.255 151.151,125.985 ; KANAN2.39@152.181,126.28 150.575,125.476 ; KANAN.39@144.89,126.746 145.919,126.793 ; KANAN.39@144.89,126.746 145.919,126.699 ; KANAN.39@144.89,126.746 146.304,126.746 ; 146.304,126.746 147.574,125.476 150.575,125.476 ; 150.575,125.476 KANAN2.39@151.845,126.746 ; 150.575,125.476 151.676,126.895 151.084,126.052 ; 150.575,125.476 151.994,126.577 151.151,125.985 ; 150.575,125.476 KANAN2.39@151.845,126.746 ; 151.084,126.052 KANAN2.39@151.845,126.746 ; 151.151,125.985 KANAN2.39@151.845,126.746
NetKANAN2_40: KANAN2.40 KANAN.40 KIPAS.3 Rkip.2 | length 150.2
  Top Layer w0.35: KIPAS.3@124.622,142.018 125.616,142.287 ; KIPAS.3@124.622,142.462 125.616,142.193 ; KIPAS.3@124.679,141.672 126.387,142.24 ; KIPAS.3@124.679,142.808 126.387,142.24 ; KIPAS.3@124.722,141.681 125.616,142.193 ; KIPAS.3@124.722,142.799 125.616,142.287 ; KIPAS.3@124.773,141.696 125.616,142.287 ; KIPAS.3@124.773,142.784 125.616,142.193 ; KIPAS.3@124.994,141.833 cw(c125.975,140.852) 125.975,142.24 cw(c125.975,143.628) KIPAS.3@124.994,142.647 ; 127.617,142.24 ccw(c127.617,144.193) Rkip.2@128.998,142.812 ; 128.245,142.24 cw(c128.245,141.175) Rkip.2@128.998,141.928 ; 128.462,142.24 ccw(c128.462,143.348) Rkip.2@129.246,142.564 ; Rkip.2@129.129,142.912 128.521,142.204 ; Rkip.2@129.263,142.969 128.123,142.307 ; Rkip.2@129.292,142.977 127.583,142.24 ; Rkip.2@129.321,141.756 128.123,142.307 ; Rkip.2@129.339,141.753 128.521,142.204 ; Rkip.2@129.352,142.63 128.521,142.204 ; Rkip.2@129.378,141.748 127.583,142.24 ; Rkip.2@129.398,142.642 128.123,142.307 ; Rkip.2@129.401,142.642 127.583,142.24 ; Rkip.2@129.41,142.24 KIPAS.3@124.587,142.24 ; Rkip.2@129.425,142.095 128.123,142.307 ; Rkip.2@129.439,142.095 127.583,142.24 ; Rkip.2@129.449,142.095 128.521,142.204 ; Rkip.2@129.54,142.37 145.666,142.37 147.32,140.716 147.32,128.524 149.098,126.746 KANAN2.40@149.305,126.746 147.745,128.099 ; Rkip.2@129.686,142.099 130.758,142.421 ; Rkip.2@129.686,142.641 130.758,142.319 ; Rkip.2@129.746,141.754 131.49,142.37 ; Rkip.2@129.746,142.986 131.49,142.37 ; Rkip.2@129.787,141.762 130.758,142.319 ; Rkip.2@129.787,142.978 130.758,142.421 ; Rkip.2@129.842,141.778 130.758,142.421 ; Rkip.2@129.842,142.962 130.758,142.319 ; Rkip.2@130.082,141.928 cw(c131.149,140.861) 131.149,142.37 cw(c131.149,143.879) Rkip.2@130.082,142.812 ; KANAN2.40@148.871,126.368 147.745,128.099 ; KANAN2.40@149.149,126.584 147.745,128.099 ; KANAN2.40@149.443,126.924 147.745,128.099 ; KANAN2.40@149.618,127.229 147.745,128.099 ; KIPAS.3@124.587,142.24 125.616,142.287 ; KIPAS.3@124.587,142.24 125.616,142.193 ; 125.616,142.193 124.601,142.015 126.387,142.24 ; 125.616,142.287 124.601,142.465 126.387,142.24 ; 127.583,142.24 Rkip.2@129.44,142.37 ; 128.123,142.307 Rkip.2@129.44,142.37 ; 128.521,142.204 Rkip.2@129.44,142.37 ; Rkip.2@129.64,142.37 131.49,142.37 ; Rkip.2@129.64,142.37 130.758,142.421 ; Rkip.2@129.64,142.37 130.758,142.319 ; 130.758,142.319 129.661,142.096 131.49,142.37 ; 130.758,142.421 129.661,142.644 131.49,142.37
  Bottom Layer w0.35: KANAN.40@142.017,127.214 143.575,127.971 ; KANAN.40@142.05,127.237 143.044,127.507 ; KANAN.40@142.096,127.262 143.111,127.44 ; KANAN.40@142.217,126.928 143.111,127.44 ; KANAN.40@142.35,127.321 ccw(c142.35,128.709) 143.332,127.728 ccw(c144.313,126.746) KANAN.40@142.925,126.746 ; KANAN.40@142.532,126.613 143.044,127.507 ; KANAN.40@142.818,126.413 143.575,127.971 ; KANAN.40@142.841,126.446 143.111,127.44 ; KANAN.40@142.866,126.493 143.044,127.507 ; KANAN2.40@149.202,126.18 147.701,126.746 ; KANAN2.40@149.202,127.312 147.701,126.746 ; KANAN2.40@149.289,126.522 147.701,126.746 ; KANAN2.40@149.289,126.97 147.701,126.746 ; KANAN.40@142.35,126.746 143.044,127.507 ; KANAN.40@142.35,126.746 143.111,127.44 ; KANAN.40@142.35,126.746 143.575,127.971 ; 143.044,127.507 142.201,126.915 143.575,127.971 ; 143.111,127.44 142.519,126.597 143.575,127.971 ; 143.575,127.971 146.476,127.971 147.701,126.746 ; 147.701,126.746 KANAN2.40@149.305,126.746 147.701,126.746
NetKANAN2_42: KANAN2.42 KANAN.42 | length 56.4
  Bottom Layer w0.35: KANAN.42@142.115,129.811 144.102,130.386 ; KANAN.42@142.14,129.821 143.615,130.09 ; KANAN.42@142.241,129.483 144.102,130.386 ; KANAN.42@142.244,129.484 143.615,130.09 ; KANAN.42@142.285,129.501 143.255,129.678 ; KANAN.42@142.285,129.857 143.255,129.678 ; KANAN.42@142.341,129.161 ccw(c142.423,130.249) 143.194,129.478 ; KANAN.42@142.367,129.51 ccw(c142.498,131.251) 143.733,130.017 ; KANAN.42@142.393,129.859 ccw(c142.574,132.254) 144.272,130.556 ; KANAN.42@142.462,129.091 143.255,129.678 ; KANAN.42@142.48,129.102 144.102,130.386 ; KANAN.42@142.485,129.106 143.615,130.09 ; KANAN.42@142.72,128.846 144.102,130.386 ; KANAN.42@142.722,128.848 143.255,129.678 ; KANAN.42@142.746,128.869 143.615,130.09 ; KANAN2.42@148.898,128.879 ccw(c147.917,127.898) 147.917,129.286 ccw(c147.917,130.674) KANAN2.42@148.898,129.693 ; KANAN2.42@149.119,128.742 148.276,129.333 ; KANAN2.42@149.119,129.83 148.276,129.239 ; KANAN2.42@149.17,128.727 148.276,129.239 ; KANAN2.42@149.17,129.845 148.276,129.333 ; KANAN2.42@149.21,128.719 147.574,129.286 ; KANAN2.42@149.21,129.853 147.574,129.286 ; KANAN2.42@149.27,129.064 148.276,129.333 ; KANAN2.42@149.27,129.508 148.276,129.239 ; KANAN2.42@149.29,129.061 147.574,129.286 ; KANAN2.42@149.29,129.511 147.574,129.286 ; KANAN2.42@149.291,129.061 148.276,129.239 ; KANAN2.42@149.291,129.511 148.276,129.333 ; KANAN.42@142.35,129.286 143.255,129.678 ; KANAN.42@142.35,129.286 143.615,130.09 ; KANAN.42@142.35,129.286 144.102,130.386 ; KANAN.42@142.35,129.286 143.002,129.286 144.272,130.556 ; 144.272,130.556 146.304,130.556 147.574,129.286 ; 147.574,129.286 KANAN2.42@149.305,129.286 ; 147.574,129.286 KANAN2.42@149.305,129.286 ; 148.276,129.239 KANAN2.42@149.305,129.286 ; 148.276,129.333 KANAN2.42@149.305,129.286
NetKANAN2_43: KANAN2.43 KANAN.43 | length 47.6
  Bottom Layer w0.35: KANAN.43@144.904,131.601 145.919,131.779 ; KANAN.43@144.904,132.051 145.919,131.873 ; KANAN.43@144.908,131.602 146.304,131.826 ; KANAN.43@144.908,132.05 146.304,131.826 ; KANAN.43@144.925,131.604 145.919,131.873 ; KANAN.43@144.925,132.048 145.919,131.779 ; KANAN.43@145.007,131.263 146.304,131.826 ; KANAN.43@145.007,132.389 146.304,131.826 ; KANAN.43@145.025,131.267 145.919,131.779 ; KANAN.43@145.025,132.385 145.919,131.873 ; KANAN.43@145.076,131.282 145.919,131.873 ; KANAN.43@145.076,132.37 145.919,131.779 ; KANAN.43@145.297,131.419 cw(c146.278,130.438) 146.278,131.826 cw(c146.278,133.214) KANAN.43@145.297,132.233 ; KANAN2.43@151.27,131.826 cw(c149.882,131.826) 150.863,130.844 cw(c151.845,129.863) KANAN2.43@151.845,131.251 ; KANAN2.43@151.329,132.079 151.151,131.065 ; KANAN2.43@151.354,132.126 151.084,131.132 ; KANAN2.43@151.379,132.162 150.575,130.556 ; KANAN2.43@151.663,131.959 151.151,131.065 ; KANAN2.43@151.978,131.644 151.084,131.132 ; KANAN2.43@152.099,131.31 151.084,131.132 ; KANAN2.43@152.145,131.335 151.151,131.065 ; KANAN2.43@152.181,131.36 150.575,130.556 ; KANAN.43@144.89,131.826 145.919,131.873 ; KANAN.43@144.89,131.826 145.919,131.779 ; KANAN.43@144.89,131.826 146.304,131.826 ; 146.304,131.826 147.574,130.556 150.575,130.556 ; 150.575,130.556 KANAN2.43@151.845,131.826 ; 150.575,130.556 151.676,131.975 151.084,131.132 ; 150.575,130.556 151.994,131.657 151.151,131.065 ; 150.575,130.556 KANAN2.43@151.845,131.826 ; 151.084,131.132 KANAN2.43@151.845,131.826 ; 151.151,131.065 KANAN2.43@151.845,131.826
NetKANAN2_44: KANAN2.44 KANAN.44 | length 47.9
  Bottom Layer w0.35: KANAN.44@142.017,132.294 143.575,133.051 ; KANAN.44@142.05,132.317 143.044,132.587 ; KANAN.44@142.096,132.342 143.111,132.52 ; KANAN.44@142.217,132.008 143.111,132.52 ; KANAN.44@142.35,132.401 ccw(c142.35,133.789) 143.332,132.808 ccw(c144.313,131.826) KANAN.44@142.925,131.826 ; KANAN.44@142.532,131.693 143.044,132.587 ; KANAN.44@142.818,131.493 143.575,133.051 ; KANAN.44@142.841,131.526 143.111,132.52 ; KANAN.44@142.866,131.573 143.044,132.587 ; KANAN2.44@148.898,131.419 ccw(c147.917,130.438) 147.917,131.826 ccw(c147.917,133.214) KANAN2.44@148.898,132.233 ; KANAN2.44@149.119,131.282 148.276,131.873 ; KANAN2.44@149.119,132.37 148.276,131.779 ; KANAN2.44@149.17,131.267 148.276,131.779 ; KANAN2.44@149.17,132.385 148.276,131.873 ; KANAN2.44@149.202,131.26 147.701,131.826 ; KANAN2.44@149.202,132.392 147.701,131.826 ; KANAN2.44@149.27,131.604 148.276,131.873 ; KANAN2.44@149.27,132.048 148.276,131.779 ; KANAN2.44@149.289,131.602 147.701,131.826 ; KANAN2.44@149.289,132.05 147.701,131.826 ; KANAN2.44@149.291,131.601 148.276,131.779 ; KANAN2.44@149.291,132.051 148.276,131.873 ; KANAN.44@142.35,131.826 143.044,132.587 ; KANAN.44@142.35,131.826 143.111,132.52 ; KANAN.44@142.35,131.826 143.575,133.051 ; 143.044,132.587 142.201,131.995 143.575,133.051 ; 143.111,132.52 142.519,131.677 143.575,133.051 ; 143.575,133.051 146.476,133.051 147.701,131.826 ; 147.701,131.826 KANAN2.44@149.305,131.826 ; 147.701,131.826 KANAN2.44@149.305,131.826 ; 148.276,131.779 KANAN2.44@149.305,131.826 ; 148.276,131.873 KANAN2.44@149.305,131.826
NetKANAN2_45: KANAN2.45 KANAN.45 | length 43.3
  Bottom Layer w0.35: KANAN.45@144.904,134.141 145.919,134.319 ; KANAN.45@144.904,134.591 145.919,134.413 ; KANAN.45@144.905,134.142 146.558,134.366 ; KANAN.45@144.905,134.59 146.558,134.366 ; KANAN.45@144.925,134.144 145.919,134.413 ; KANAN.45@144.925,134.588 145.919,134.319 ; KANAN.45@144.989,133.8 146.558,134.366 ; KANAN.45@144.989,134.932 146.558,134.366 ; KANAN.45@145.025,133.807 145.919,134.319 ; KANAN.45@145.025,134.925 145.919,134.413 ; KANAN.45@145.076,133.822 145.919,134.413 ; KANAN.45@145.076,134.91 145.919,134.319 ; KANAN.45@145.297,133.959 cw(c146.278,132.978) 146.278,134.366 cw(c146.278,135.754) KANAN.45@145.297,134.773 ; 150.804,133.241 ccw(c149.679,134.366) KANAN2.45@151.27,134.366 ; 151.007,133.444 cw(c151.845,132.606) KANAN2.45@151.845,133.791 ; KANAN2.45@151.346,134.652 151.057,133.571 ; KANAN2.45@151.363,134.68 150.704,133.141 ; KANAN2.45@151.67,134.508 151.057,133.571 ; KANAN2.45@151.67,134.508 150.704,133.141 ; KANAN2.45@151.988,134.192 151.057,133.571 ; KANAN2.45@151.999,134.202 150.704,133.141 ; KANAN2.45@152.136,133.87 151.057,133.571 ; KANAN2.45@152.192,133.908 150.704,133.141 ; KANAN.45@144.89,134.366 145.919,134.319 ; KANAN.45@144.89,134.366 145.919,134.413 ; KANAN.45@144.89,134.366 146.558,134.366 ; 146.558,134.366 147.783,133.141 150.704,133.141 ; 150.704,133.141 KANAN2.45@151.845,134.366 ; 150.704,133.141 151.845,134.282 KANAN2.45@151.845,134.366 ; 151.057,133.571 KANAN2.45@151.845,134.366
NetKANAN2_46: KANAN2.46 KANAN.46 | length 46.4
  Bottom Layer w0.35: KANAN.46@142.014,134.832 143.62,135.636 ; KANAN.46@142.05,134.857 143.044,135.127 ; KANAN.46@142.096,134.882 143.111,135.06 ; KANAN.46@142.201,134.535 143.62,135.636 ; KANAN.46@142.201,134.535 143.044,135.127 ; KANAN.46@142.217,134.548 143.111,135.06 ; KANAN.46@142.35,134.941 ccw(c142.35,136.329) 143.332,135.348 ccw(c144.313,134.366) KANAN.46@142.925,134.366 ; KANAN.46@142.519,134.217 143.62,135.636 ; KANAN.46@142.519,134.217 143.111,135.06 ; KANAN.46@142.532,134.233 143.044,135.127 ; KANAN.46@142.816,134.03 143.62,135.636 ; KANAN.46@142.841,134.066 143.111,135.06 ; KANAN.46@142.866,134.113 143.044,135.127 ; KANAN2.46@148.89,133.968 ccw(c147.955,133.069) 147.955,134.366 ; KANAN2.46@148.89,134.764 cw(c147.955,135.663) 147.955,134.366 ; KANAN2.46@149.11,133.825 148.316,134.417 ; KANAN2.46@149.11,134.907 148.316,134.315 ; KANAN2.46@149.167,133.808 148.316,134.315 ; KANAN2.46@149.167,134.924 148.316,134.417 ; KANAN2.46@149.183,133.804 147.955,134.366 ; KANAN2.46@149.183,134.928 147.955,134.366 ; KANAN2.46@149.268,134.144 148.316,134.417 ; KANAN2.46@149.268,134.588 148.316,134.315 ; KANAN2.46@149.286,134.142 147.955,134.366 ; KANAN2.46@149.286,134.59 147.955,134.366 ; KANAN2.46@149.291,134.141 148.316,134.315 ; KANAN2.46@149.291,134.591 148.316,134.417 ; KANAN.46@142.35,134.366 143.044,135.127 ; KANAN.46@142.35,134.366 143.111,135.06 ; KANAN.46@142.35,134.366 143.62,135.636 ; 143.62,135.636 146.685,135.636 147.955,134.366 ; 147.955,134.366 KANAN2.46@149.305,134.366 ; 147.955,134.366 KANAN2.46@149.305,134.366 ; 148.316,134.315 KANAN2.46@149.305,134.366 ; 148.316,134.417 KANAN2.46@149.305,134.366
NetKANAN2_47: KANAN2.47 KANAN.47 | length 49
  Bottom Layer w0.35: KANAN.47@144.904,136.681 145.919,136.859 ; KANAN.47@144.904,137.131 145.919,136.953 ; KANAN.47@144.905,136.682 146.558,136.906 ; KANAN.47@144.905,137.13 146.558,136.906 ; KANAN.47@144.925,136.684 145.919,136.953 ; KANAN.47@144.925,137.128 145.919,136.859 ; KANAN.47@144.989,136.34 146.558,136.906 ; KANAN.47@144.989,137.472 146.558,136.906 ; KANAN.47@145.025,136.347 145.919,136.859 ; KANAN.47@145.025,137.465 145.919,136.953 ; KANAN.47@145.076,136.362 145.919,136.953 ; KANAN.47@145.076,137.45 145.919,136.859 ; KANAN.47@145.297,136.499 cw(c146.278,135.518) 146.278,136.906 cw(c146.278,138.294) KANAN.47@145.297,137.313 ; KANAN2.47@151.27,136.906 cw(c149.882,136.906) 150.863,135.924 cw(c151.845,134.943) KANAN2.47@151.845,136.331 ; KANAN2.47@151.329,137.159 151.151,136.145 ; KANAN2.47@151.354,137.206 151.084,136.212 ; KANAN2.47@151.38,137.245 150.53,135.591 ; KANAN2.47@151.663,137.039 151.151,136.145 ; KANAN2.47@151.978,136.724 151.084,136.212 ; KANAN2.47@152.099,136.39 151.084,136.212 ; KANAN2.47@152.145,136.415 151.151,136.145 ; KANAN2.47@152.184,136.441 150.53,135.591 ; KANAN.47@144.89,136.906 145.919,136.953 ; KANAN.47@144.89,136.906 145.919,136.859 ; KANAN.47@144.89,136.906 146.558,136.906 ; 146.558,136.906 147.873,135.591 150.53,135.591 ; 150.53,135.591 KANAN2.47@151.845,136.906 ; 150.53,135.591 151.677,137.055 151.084,136.212 ; 150.53,135.591 151.994,136.738 151.151,136.145 ; 150.53,135.591 KANAN2.47@151.845,136.906 ; 151.084,136.212 KANAN2.47@151.845,136.906 ; 151.151,136.145 KANAN2.47@151.845,136.906
NetKANAN2_48: KANAN2.48 KANAN.48 | length 48.8
  Bottom Layer w0.35: KANAN.48@142.014,137.372 143.62,138.176 ; KANAN.48@142.05,137.397 143.044,137.667 ; KANAN.48@142.096,137.422 143.111,137.6 ; KANAN.48@142.201,137.075 143.62,138.176 ; KANAN.48@142.201,137.075 143.044,137.667 ; KANAN.48@142.217,137.088 143.111,137.6 ; KANAN.48@142.35,137.481 ccw(c142.35,138.869) 143.332,137.888 ccw(c144.313,136.906) KANAN.48@142.925,136.906 ; KANAN.48@142.519,136.757 143.62,138.176 ; KANAN.48@142.519,136.757 143.111,137.6 ; KANAN.48@142.532,136.773 143.044,137.667 ; KANAN.48@142.816,136.57 143.62,138.176 ; KANAN.48@142.841,136.606 143.111,137.6 ; KANAN.48@142.866,136.653 143.044,137.667 ; KANAN2.48@148.898,136.499 ccw(c147.917,135.518) 147.917,136.906 ccw(c147.917,138.294) KANAN2.48@148.898,137.313 ; KANAN2.48@149.119,136.362 148.276,136.953 ; KANAN2.48@149.119,137.45 148.276,136.859 ; KANAN2.48@149.17,136.347 148.276,136.859 ; KANAN2.48@149.17,137.465 148.276,136.953 ; KANAN2.48@149.21,136.339 147.574,136.906 ; KANAN2.48@149.21,137.473 147.574,136.906 ; KANAN2.48@149.27,136.684 148.276,136.953 ; KANAN2.48@149.27,137.128 148.276,136.859 ; KANAN2.48@149.29,136.681 147.574,136.906 ; KANAN2.48@149.29,137.131 147.574,136.906 ; KANAN2.48@149.291,136.681 148.276,136.859 ; KANAN2.48@149.291,137.131 148.276,136.953 ; KANAN.48@142.35,136.906 143.044,137.667 ; KANAN.48@142.35,136.906 143.111,137.6 ; KANAN.48@142.35,136.906 143.62,138.176 ; 143.62,138.176 146.304,138.176 147.574,136.906 ; 147.574,136.906 KANAN2.48@149.305,136.906 ; 147.574,136.906 KANAN2.48@149.305,136.906 ; 148.276,136.859 KANAN2.48@149.305,136.906 ; 148.276,136.953 KANAN2.48@149.305,136.906
NetKIRI2_11: KIRI2.11 KIRI.11 | length 48.6
  Bottom Layer w0.35: KIRI.11@87.03,90.71 88.024,90.979 ; KIRI.11@87.03,91.154 88.024,90.885 ; KIRI.11@87.09,90.365 88.743,90.932 ; KIRI.11@87.09,91.499 88.743,90.932 ; KIRI.11@87.13,90.373 88.024,90.885 ; KIRI.11@87.13,91.491 88.024,90.979 ; KIRI.11@87.181,90.388 88.024,90.979 ; KIRI.11@87.181,91.476 88.024,90.885 ; KIRI.11@87.402,90.525 cw(c88.383,89.544) 88.383,90.932 cw(c88.383,92.32) KIRI.11@87.402,91.339 ; KIRI2.11@93.375,90.937 cw(c91.987,90.937) 92.968,89.955 cw(c93.95,88.974) KIRI2.11@93.95,90.362 ; KIRI2.11@93.434,91.19 93.256,90.176 ; KIRI2.11@93.459,91.237 93.189,90.243 ; KIRI2.11@93.482,91.27 92.725,89.712 ; KIRI2.11@93.768,91.07 93.256,90.176 ; KIRI2.11@94.083,90.755 93.189,90.243 ; KIRI2.11@94.203,90.421 93.189,90.243 ; KIRI2.11@94.25,90.446 93.256,90.176 ; KIRI2.11@94.283,90.469 92.725,89.712 ; KIRI.11@86.995,90.932 88.024,90.979 ; KIRI.11@86.995,90.932 88.024,90.885 ; KIRI.11@86.995,90.932 88.743,90.932 ; 88.024,90.885 87.009,90.707 88.743,90.932 ; 88.024,90.979 87.009,91.157 88.743,90.932 ; 88.743,90.932 89.963,89.712 92.725,89.712 ; 92.725,89.712 KIRI2.11@93.95,90.937 ; 92.725,89.712 93.781,91.085 93.189,90.243 ; 92.725,89.712 94.098,90.768 93.256,90.176 ; 92.725,89.712 KIRI2.11@93.95,90.937 ; 93.189,90.243 KIRI2.11@93.95,90.937 ; 93.256,90.176 KIRI2.11@93.95,90.937
NetKIRI2_12: KIRI2.12 KIRI.12 | length 48.6
  Bottom Layer w0.35: KIRI.12@84.122,91.4 85.68,92.157 ; KIRI.12@84.155,91.423 85.149,91.693 ; KIRI.12@84.202,91.448 85.216,91.626 ; KIRI.12@84.322,91.114 85.216,91.626 ; KIRI.12@84.455,91.507 ccw(c84.455,92.895) 85.437,91.914 ccw(c86.418,90.932) KIRI.12@85.03,90.932 ; KIRI.12@84.637,90.799 85.149,91.693 ; KIRI.12@84.923,90.599 85.68,92.157 ; KIRI.12@84.946,90.632 85.216,91.626 ; KIRI.12@84.971,90.679 85.149,91.693 ; KIRI2.12@91.003,90.53 ccw(c90.022,89.549) 90.022,90.937 ccw(c90.022,92.325) KIRI2.12@91.003,91.344 ; KIRI2.12@91.224,90.393 90.381,90.984 ; KIRI2.12@91.224,91.481 90.381,90.89 ; KIRI2.12@91.275,90.378 90.381,90.89 ; KIRI2.12@91.275,91.496 90.381,90.984 ; KIRI2.12@91.316,90.37 89.657,90.937 ; KIRI2.12@91.316,91.504 89.657,90.937 ; KIRI2.12@91.375,90.715 90.381,90.984 ; KIRI2.12@91.375,91.159 90.381,90.89 ; KIRI.12@84.455,90.932 85.149,91.693 ; KIRI.12@84.455,90.932 85.216,91.626 ; KIRI.12@84.455,90.932 85.68,92.157 ; 85.149,91.693 84.306,91.101 85.68,92.157 ; 85.216,91.626 84.624,90.783 85.68,92.157 ; 85.68,92.157 88.437,92.157 89.657,90.937 ; 89.657,90.937 KIRI2.12@91.41,90.937 ; 89.657,90.937 91.396,91.162 90.381,90.984 ; 89.657,90.937 91.396,90.712 90.381,90.89 ; 89.657,90.937 KIRI2.12@91.41,90.937 ; 90.381,90.89 KIRI2.12@91.41,90.937 ; 90.381,90.984 KIRI2.12@91.41,90.937